# EAGLE board OSO-MISC-22-004 WIP-NFC (EAGLE 9.6.2)
REV: D
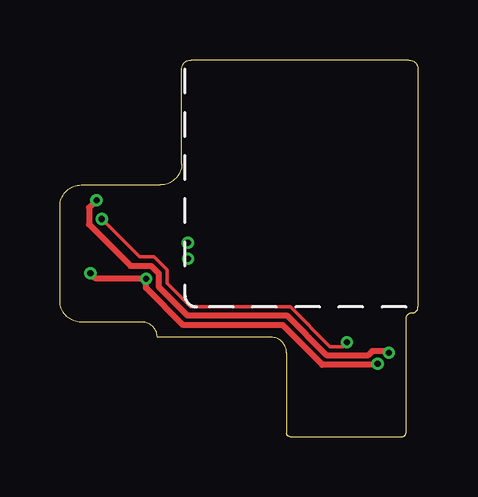
[diagram p0: board, top side]
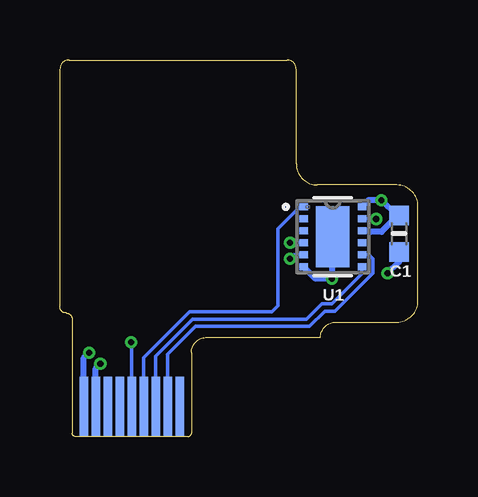
[diagram p1: board, bottom side, seen from below]

Size 14.94 x 15.69 mm. Coordinates in mm from the lower left corner, seen from the top.
Outline: 9.45,3.5 arc90 8.81,4.14 4.06,4.14 arc90 3.43,4.77 0.89,4.77 arc-90 0,5.66 0,9.6 arc-90 0.89,10.48 4.19,10.48 arc90 5.08,11.37 5.08,15.31 arc-90 5.46,15.69 14.55,15.69 arc-90 14.94,15.31 14.94,5.41 arc-90 14.68,5.15 arc90 14.43,4.9 14.43,3.5
Copper layers (1*16): Top 0.035559375mm / dielectric 1.6mm / Bottom 0.035559375mm
Design rules "temp": minimum track width 6mil, minimum drill 10mil, track to track 6mil, track to pad 6mil, pad to pad 6mil, via to via 6mil, smd to smd 6mil, copper to edge 15mil, drill to drill 6mil, minimum pad ring 5mil, minimum via ring 5mil, stop-mask expansion 2.5mil, vias tented up to drill 0mil, thermal gap 10mil
Net classes: 0 default: width 0.152 mm; 1 power: width 0.254 mm; 2 gnd: width 0.254 mm

## Footprints (pad centres in the part's own frame; a part is rotated, then mirrored left to right if it is on the bottom)
_0603MP = smd 0.8 x 0.8: 1 -0.762,0; 2 0.762,0
UFDFPN12_3X3_STM = smd 0.356 x 0.305: 1 -1.219,1.25; 2 -1.219,0.75; 3 -1.219,0.25; 4 -1.219,-0.25; 5 -1.219,-0.75; 6 -1.219,-1.25; 7 1.219,-1.25; 8 1.219,-0.75; 9 1.219,-0.25; 10 1.219,0.25; 11 1.219,0.75; 12 1.219,1.25 | smd 1.397 x 2.54: 13 0,0
FH19C9S05SH10-FFC = smd 0.347 x 2.5 bottom: 1 2,-2.25; 2 1.5,-2.25; 3 1,-2.25; 4 0.5,-2.25; 5 0,-2.25; 6 -0.5,-2.25; 7 -1,-2.25; 8 -1.5,-2.25; 9 -2,-2.25

## Placement (x,y rotation side)
C1  1uF  [_0603MP]  0.79,8.45 270 bottom
U1  ST25DV64K-JFR8D3  [UFDFPN12_3X3_STM]  3.56,8.33 0 bottom
U$3  FH19C-9S-0.5SH_10-FFC  [FH19C9S05SH10-FFC]  11.94,3.5 0 top

## Library data of the parts
C1 = microbuilder
U1 = ST25DV64K; COPYRIGHT: Copyright (C) 2021 Ultra Librarian. All rights reserved.; DIGI-KEY_PART_NUMBER_1: 497-19303-2-ND; DIGI-KEY_PART_NUMBER_2: 497-19303-1-ND; DIGI-KEY_PART_NUMBER_3: 497-19303-6-ND; MANUFACTURER_PART_NUMBER: ST25DV64K-JFR8D3; MFR_NAME: STMicroelectronics
U$3 = FH19C-9S-0.5SH

## Nets
3.3V [power]: C1.1 U1.10 U1.12 U$3.1
AC0: U1.4
AC1: U1.5
GND [gnd]: C1.2 U1.6 U1.13 U$3.2
INT: U1.11 U$3.5
LPD: U1.1 U$3.6
SCL: U1.8 U$3.8
SDA: U1.7 U$3.7

## Tracks (layer width: path | path; a pad name or v marks a point on that pad's centre or on a via)
3.3V  (via drill 0.25)
  Top 0.254: v1.52,9.85 1.21,9.54 1.21,8.85 2.95,7.11 3.81,7.11 4.12,6.8 4.12,6.24 5.31,5.05 9.46,5.05 11.11,3.4 12.86,3.4 13.03,3.57 13.65,3.57 v13.72,3.5
  Bottom 0.254: U$3.1 13.94,3.28 v13.72,3.5 | U1.12 2.06,9.85 v1.52,9.85 0.89,9.21 C1.1 0.85,9.21 1.53,8.54 1.97,8.54 2.01,8.58 U1.10
AC0  (via drill 0.25)
  Bottom 0.152: U1.4 v5.33,8.07
AC1  (via drill 0.25)
  Bottom 0.152: U1.5 5.18,7.58 v5.35,7.41
GND  (via drill 0.25)
  Top 0.254: v1.27,6.8 1.49,6.58 v3.59,6.58 3.59,6.2 5.14,4.64 9.29,4.64 10.94,2.99 13.21,2.99 v13.25,3.03
  Bottom 0.254: v1.27,6.8 0.79,7.29 C1.2 | 13.46,1.27 U$3.2 13.44,2.84 v13.25,3.03 | U1.13 3.59,8.29 v3.59,6.58 4.28,6.58 U1.6
INT  (via drill 0.25)
  Top 0.152: v11.97,3.93 11.79,3.75 11.26,3.75 9.61,5.41 5.46,5.41 4.48,6.38 4.48,6.95 3.93,7.49 3.32,7.49 v1.75,9.07
  Bottom 0.152: U1.11 v1.75,9.07 | U$3.5 11.94,3.9 v11.97,3.93
LPD
  Bottom 0.152: U1.1 4.93,9.58 5.84,8.66 5.84,5.46 6.1,5.2 9.53,5.2 11.44,3.29 U$3.6
SCL
  Bottom 0.152: U1.8 2.04,7.58 1.88,7.41 1.88,6.81 3.46,5.23 3.89,5.23 4.52,4.59 9.27,4.59 10.44,3.43 U$3.8
SDA
  Bottom 0.152: U1.7 2.34,6.78 3.59,5.53 4.01,5.53 4.65,4.9 9.4,4.9 10.94,3.36 U$3.7